# Allegro board EZFET_V10A.brd
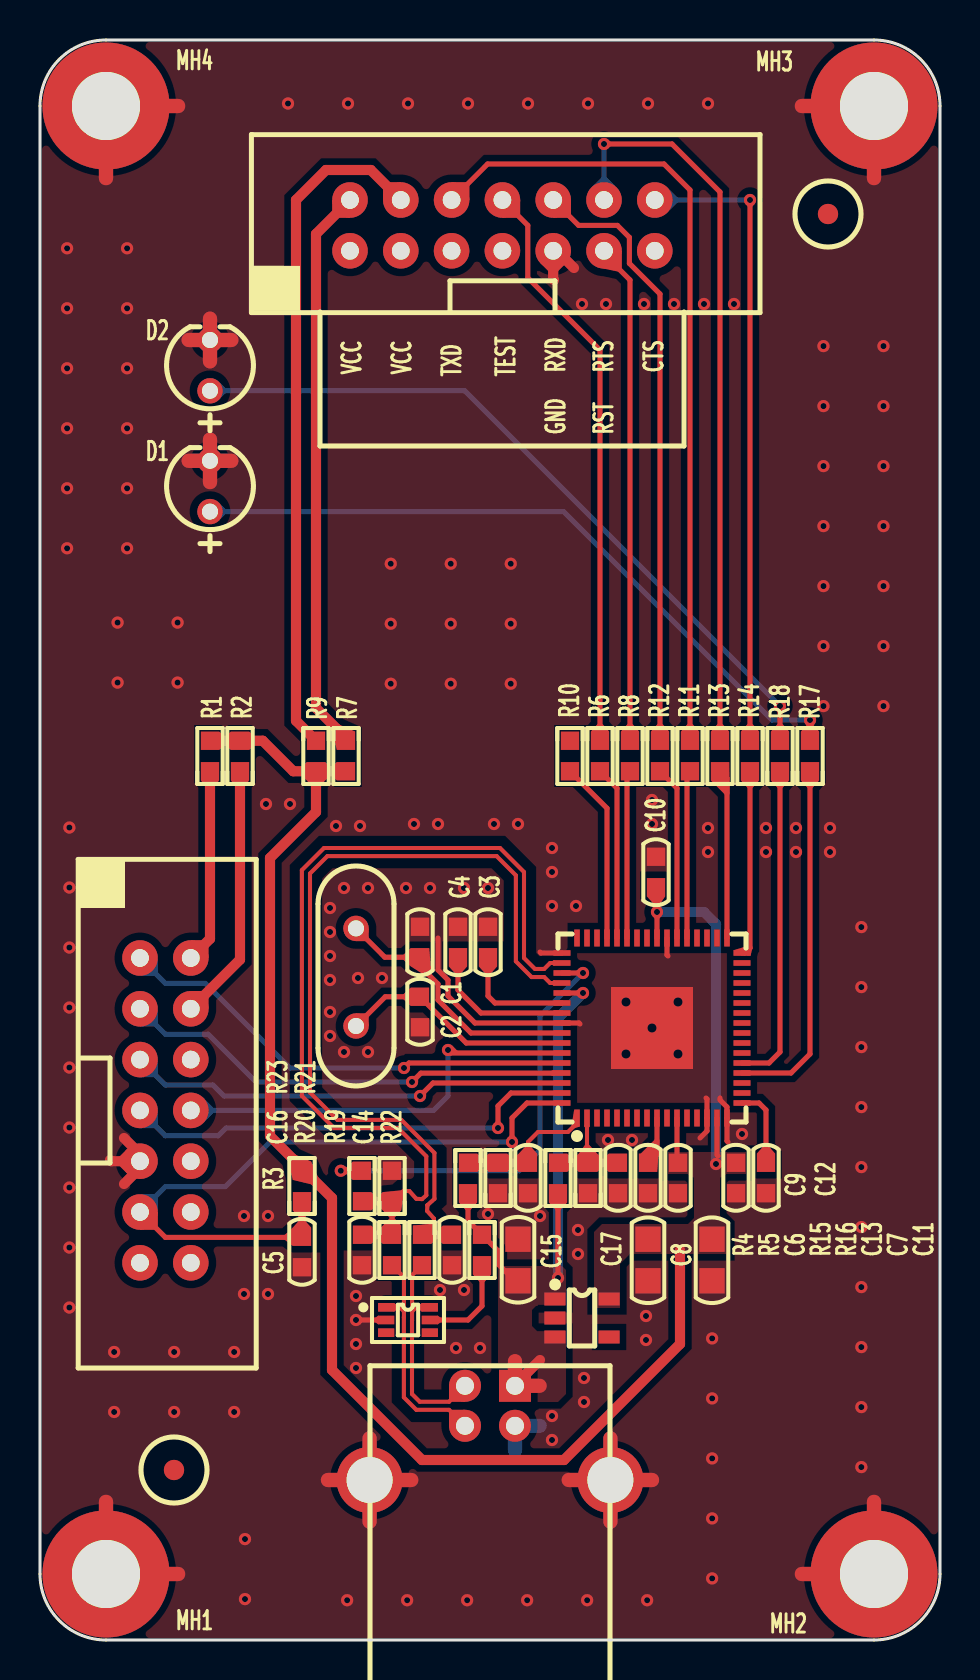
[diagram p0: board, top side]
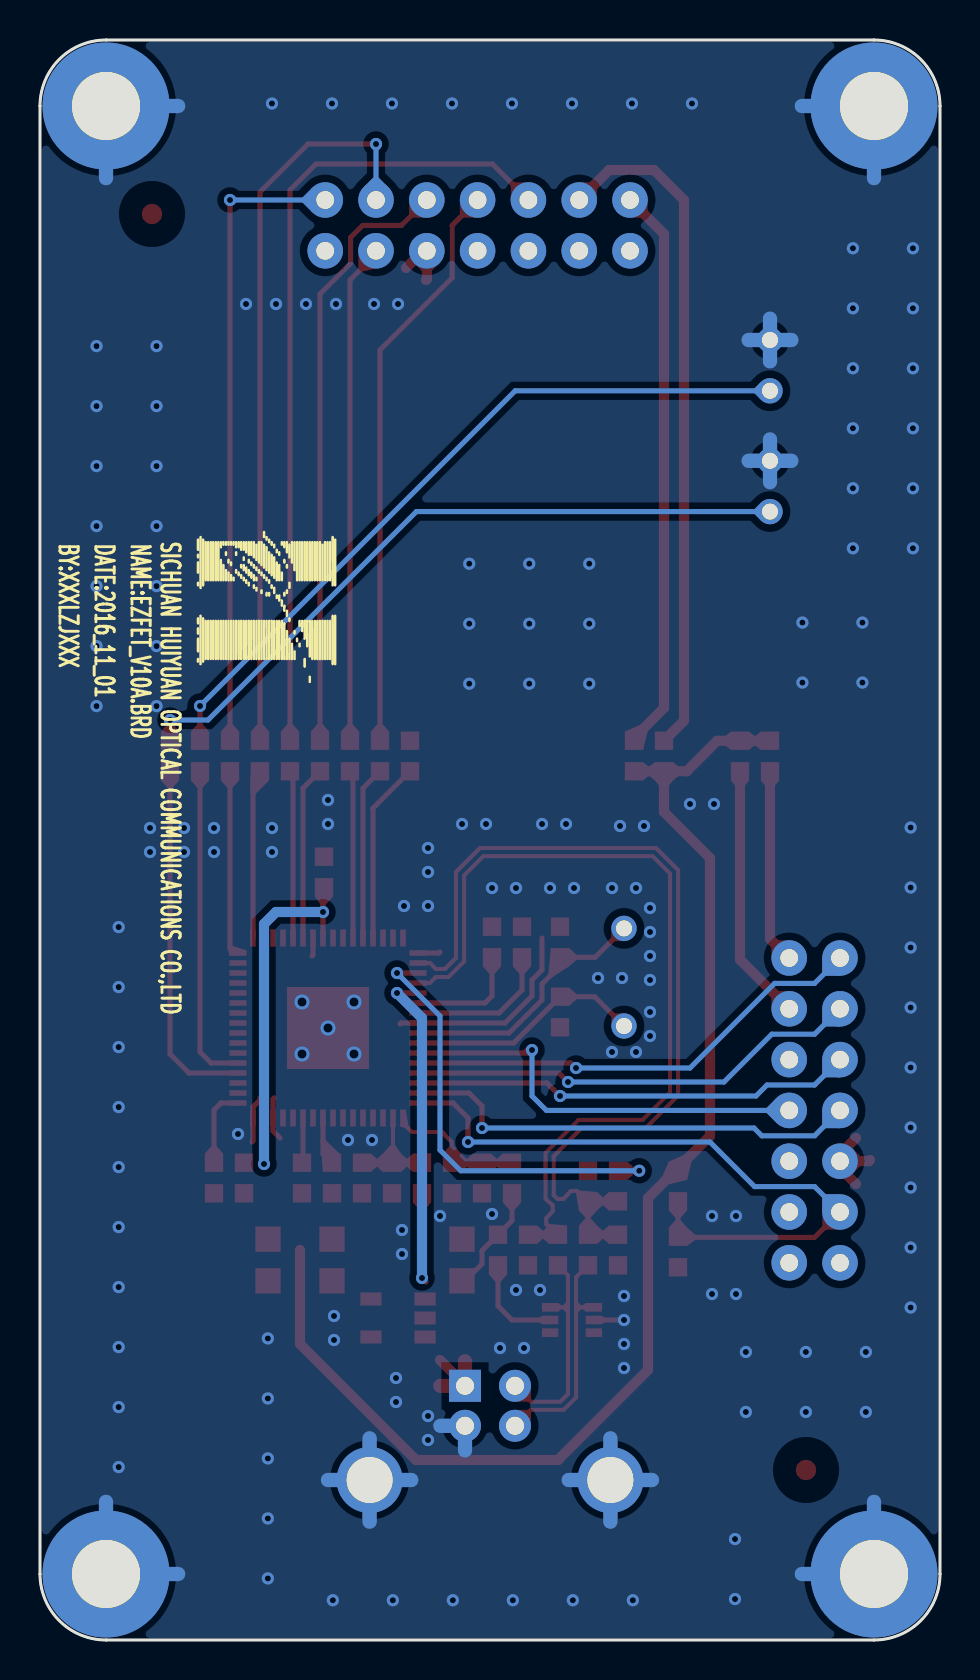
[diagram p1: board, bottom side, seen from below]

Outline 45 x 80 mm; copper layers: TOP, BOTTOM. Coordinates in mm from the lower left corner of the outline.
Outline path: 0,76.7 0,3.3 arc(0.97,0.97) 3.3,0 41.7,0 arc(44.03,0.97) 45,3.3 45,76.7 arc(44.03,79.03) 41.7,80 3.3,80 arc(0.97,79.03) 0,76.7

## Design rules (mm)
net group DP1: nets EZFET_DM EZFET_DP
net group DP2: nets EZFET_PU.0/DP EZFET_PU.1/DM

## Placement (name value [footprint] x y rotation side)
C1  20pF_50V  [CC0603]  19 34.9 270 top
C2  20pF_50V  [CC0603]  19 31.4 90 top
C3  220nF_50V  [CC0603]  22.4 34.9 270 top
C4  220nF_50V  [CC0603]  20.9 34.9 270 top
C5  1nF_50V  [CC0603]  13.1 19.4 90 top
C6  33pF_50V  [CC0603]  24.4 23.1 90 top
C7  0.1uF_50V  [CC0603]  30.4 23.1 90 top
C8  10uF_25V  [CC0805]  33.6 19 270 top
C9  0.1uF_50V  [CC0603]  34.8 23.1 90 top
C10  0.1uF_50V  [CC0603]  30.8 38.4 270 top
C11  0.1uF_50V  [CC0603]  31.9 23.1 90 top
C12  470nF_50V  [CC0603]  36.3 23.1 90 top
C13  33pF_50V  [CC0603]  28.9 23.1 90 top
C14  10pF_50V  [CC0603]  20.6 19.5 90 top
C15  10uF_25V  [CC0805]  23.9 19 90 top
C16  10pF_50V  [CC0603]  16.1 19.5 90 top
C17  10uF_25V  [CC0805]  30.4 19 270 top
D1  LED_RED  [LED_3R00]  8.5 56.42 90 top
D2  LED_GREEN  [LED_3R00]  8.5 62.46 90 top
JP1  -  [JTAG]  5 34.1 270 top
JP2  -  [JTAG]  15.5 69.46 0 top
MH1  Hold  [HOLD250D134]  3.3 3.3 0 top
MH2  Hold  [HOLD250D134]  41.7 3.3 0 top
MH3  Hold  [HOLD250D134]  41.7 76.7 0 top
MH4  Hold  [HOLD250D134]  3.3 76.7 0 top
MP1  MarkPoint  [MARKPOINT_R3]  6.7 8.5 0 top
MP2  MarkPoint  [MARKPOINT_R3]  39.4 71.3 0 top
NOREF  -  []  0 7.3 0 top
NOREF#2  -  []  7.1 0 90 top
R1  0R/NI  [RC0603]  8.5 44.2 270 top
R2  0R  [RC0603]  10 44.2 270 top
R3  47K  [RC0603]  13.1 22.7 270 top
R4  240K  [RC0603]  21.4 23.1 90 top
R5  150K  [RC0603]  22.9 23.1 270 top
R6  10R  [RC0603]  28 44.2 90 top
R7  0R/NI  [RC0603]  15.3 44.2 90 top
R8  10R  [RC0603]  29.5 44.2 90 top
R9  0R  [RC0603]  13.8 44.2 90 top
R10  10R  [RC0603]  26.5 44.2 90 top
R11  10R  [RC0603]  32.5 44.2 90 top
R12  10R  [RC0603]  31 44.2 90 top
R13  10R  [RC0603]  34 44.2 90 top
R14  10R  [RC0603]  35.5 44.2 90 top
R15  220K  [RC0603]  25.9 23.1 90 top
R16  220K  [RC0603]  27.4 23.1 270 top
R17  510R  [RC0603]  38.5 44.2 270 top
R18  510R  [RC0603]  37 44.2 270 top
R19  27R  [RC0603]  19.1 19.5 90 top
R20  27R  [RC0603]  17.6 19.5 90 top
R21  1M  [RC0603]  17.6 22.7 270 top
R22  10K  [RC0603]  22.1 19.5 90 top
R23  1.4K  [RC0603]  16.1 22.7 90 top
U1  MSP430F5528IRGC  [VQFN-64]  30.6 30.6 0 top
U2  SPX3819M5-L-3-3/TR  [SOT23-5]  27.1 16.1 270 top
U3  NUP4202W1T2G  [SC-88]  18.4 16 0 top
USB1  -  [USB-B]  22.5 12.71 0 top
X1  XTAL_4MHz_X49SD4MSD2SC  [X-HC-49S]  15.8 30.7 90 top

## Library data of the parts
C1-C7 C9-C14 C16 = CAP NP
C8 = C_Generic
C15 C17 = CAP NP_2
D1 D2 = LED_4
JP1 JP2 = JTAG
MH1-MH4 = Hold_1
MP1 MP2 = MarkPoint
R1-R23 = R_Generic
U1 = MSP430F5528IRGC
U2 = SPX3819M5-L-1-2
U3 = nup2202w1_D_2
USB1 = USB-B
X1 = XTAL_5032_0

## Footprints (pads in the part's own frame, mm; a bottom-side part is the same pattern mirrored in y, then rotated)
CC0603
  rect 0.914x0.914 smd: 1(-0.762,0) 2(0.762,0)
CC0805
  rect 1.27x1.27 smd: 1(-1.041,0) 2(1.041,0)
HOLD250D134
  round 6.35 hole 3.404: 1(0,0)
JTAG
  round 1.778 hole 0.889: 1(0,0) 2(0,2.54) 3(2.54,0) 4(2.54,2.54) 5(5.08,0) 6(5.08,2.54) 7(7.62,0) 8(7.62,2.54) 9(10.16,0) 10(10.16,2.54) 11(12.7,0) 12(12.7,2.54) 13(15.24,0) 14(15.24,2.54)
LED_3R00
  round 1.27 hole 0.8: 1(0,0) 2(2.54,0)
MARKPOINT_R3
  round 1.016 smd: 1(0,0)
RC0603
  rect 0.914x0.914 smd: 1(-0.762,0) 2(0.762,0)
SC-88
  rect 0.813x0.432 smd: 1(-1.092,0.635) 2(-1.092,0) 3(-1.092,-0.635) 4(1.092,-0.635) 5(1.092,0) 6(1.092,0.635)
SOT23-5
  rect 0.65x1.06 smd: 1(-0.95,-1.354) 2(0,-1.354) 3(0.95,-1.354) 4(0.95,1.354) 5(-0.95,1.354)
USB-B
  rect 1.6x1.6 hole 0.9: 1(1.25,0)
  round 1.6 hole 0.9: 2(-1.25,0) 3(-1.25,-2) 4(1.25,-2)
  round 3.3 hole 2.3: 5(6.02,-4.71) 6(-6.02,-4.71)
VQFN-64
  rect 0.28x0.85 smd: 1(-3.75,-4.5) 2(-3.25,-4.5) 3(-2.75,-4.5) 4(-2.25,-4.5) 5(-1.75,-4.5) 6(-1.25,-4.5) 7(-0.75,-4.5) 8(-0.25,-4.5) 9(0.25,-4.5) 10(0.75,-4.5) 11(1.25,-4.5) 12(1.75,-4.5) 13(2.25,-4.5) 14(2.75,-4.5) 15(3.25,-4.5) 16(3.75,-4.5) 33(3.75,4.5) 34(3.25,4.5) 35(2.75,4.5) 36(2.25,4.5) 37(1.75,4.5) 38(1.25,4.5) 39(0.75,4.5) 40(0.25,4.5) 41(-0.25,4.5) 42(-0.75,4.5) 43(-1.25,4.5) 44(-1.75,4.5) 45(-2.25,4.5) 46(-2.75,4.5) 47(-3.25,4.5) 48(-3.75,4.5)
  rect 0.85x0.28 smd: 17(4.5,-3.75) 18(4.5,-3.25) 19(4.5,-2.75) 20(4.5,-2.25) 21(4.5,-1.75) 22(4.5,-1.25) 23(4.5,-0.75) 24(4.5,-0.25) 25(4.5,0.25) 26(4.5,0.75) 27(4.5,1.25) 28(4.5,1.75) 29(4.5,2.25) 30(4.5,2.75) 31(4.5,3.25) 32(4.5,3.75) 49(-4.5,3.75) 50(-4.5,3.25) 51(-4.5,2.75) 52(-4.5,2.25) 53(-4.5,1.75) 54(-4.5,1.25) 55(-4.5,0.75) 56(-4.5,0.25) 57(-4.5,-0.25) 58(-4.5,-0.75) 59(-4.5,-1.25) 60(-4.5,-1.75) 61(-4.5,-2.25) 62(-4.5,-2.75) 63(-4.5,-3.25) 64(-4.5,-3.75)
  rect 4.1x4.1 smd: 65(0,0)
X-HC-49S
  round 1.27 hole 0.8: 1(0,0) 2(4.88,0)

## Nets
GND: C1.1 C2.1 C3.1 C4.1 C5.1 C6.1 C7.1 C8.2 C9.1 C10.1 C11.1 C12.1 C13.1 C14.1 C15.2 C16.1 C17.2 D1.2(CATHODE) D2.2(CATHODE) JP1.9 JP2.9 MH1.1 MH2.1 MH3.1 MH4.1 R5.2 R16.2 R21.1 U1.14(AVSS1) U1.16(DVSS1) U1.39(DVSS2) U1.49(VSSU) U1.56(AVSS2) U1.65(GND) U2.2(GND) U3.2 USB1.4(GND) USB1.5(S1) USB1.6(S2)
EZFET_AVBUS: C6.2 R4.2 R5.1 U1.1(P6.0/CB0/A0)
EZFET_AVCC2ADC: C13.2 R15.2 R16.1 U1.2(P6.1/CB1/A1)
EZFET_DM: R19.1 U3.6 USB1.2(D-)
EZFET_DP: R20.1 U3.1 USB1.3(D+)
EZFET_LED0: R17.2 U1.20(P1.2/TA0.1)
EZFET_LED1: R18.2 U1.21(P1.3/TA0.2)
EZFET_PU.0/DP: C16.2 R20.2 R21.2 R23.1 U1.50(PU.0/DP)
EZFET_PU.1/DM: C14.2 R19.2 U1.52(PU.1/DM)
EZFET_PUR: R23.2 U1.51(PUR)
EZFET_RST: C5.2 JP1.11 R3.2 U1.64(R\S\T\/NMI/SBWTDIO)
EZFET_TCK: JP1.7 U1.63(PJ.3/TCK)
EZFET_TDI: JP1.3 U1.61(PJ.1/TDI/TCLK)
EZFET_TDO: JP1.1 U1.60(PJ.0/TDO)
EZFET_TEST: JP1.8 U1.59(TEST/SBWTCK)
EZFET_TMS: JP1.5 U1.62(PJ.2/TMS)
EZFET_V18: C4.2 U1.55(V18)
EZFET_VBUS: C15.1 R4.1 R15.1 R22.2 U1.53(VBUS) U2.1(VIN) U2.3(EN) USB1.1(VBUS)
EZFET_VCC: C8.1 C9.2 C10.2 C11.2 C17.1 R1.1 R2.1 R3.1 R7.1 R9.1 U1.11(AVCC1) U1.15(DVCC1) U1.40(DVCC2) U2.5(VOUT)
EZFET_VCORE: C12.2 U1.17(VCORE)
EZFET_VREF: C7.2 U1.9(P5.0/A8/VREF+/VEREF+)
EZFET_VUSB: C3.2 U1.54(VUSB)
T_NC_TMSC: R10.2
T_RST_RST: JP2.11 R8.2
T_TEST_TCKC: JP2.8 R6.2
T_UART_CTS: JP2.14 R14.2
T_UART_RTS: JP2.12 R13.2
T_UART_RXD: JP2.10 R12.2
T_UART_TXD: JP2.6 R11.2
N16723135: C2.2 U1.58(P5.3/XT2OUT) X1.1
N16723141: C1.2 U1.57(P5.2/XT2IN) X1.2
N16723191: D1.1(ANODE) R17.1
N16723193: D2.1(ANODE) R18.1
N16723211: R14.1 U1.32(P2.6/RTCCLK/DMAE0)
N16723239: R11.1 U1.37(P3.3/UCA0TXD/UCA0SIMO)
N16723243: R12.1 U1.38(P3.4/UCA0RXD/UCA0SOMI)
N16723247: R13.1 U1.33(P2.7/UCB0STE/UCA0CLK)
N16723303: R22.1 U3.5
N16723383: JP1.4 R2.2
N16723385: JP1.2 R1.2
N16723405: JP2.4 R9.2
N16723407: JP2.2 R7.2
N16729620: R6.1 U1.44(P4.3/PM_UCB1CLK/PM_UCA1STE)
N16729632: R8.1 U1.43(P4.2/PM_UCB1SOMI/PM_UCB1_SCL)
N16729644: R10.1 U1.45(P4.4/PM_UCA1TXD/PM_UCA1SIMO)

Pads without a net: JP1 6 10 12 13 14; JP2 1 3 5 7 13; MP1 1; MP2 1; U1 3 4 5 6 7 8 10 12 13 18 19 22 23 24 25 26 27 28 29 30 31 34 35 36 41 42 46 47 48; U2 4; U3 3 4

## Via types
v1: diameter 0.61, hole 0.305, TOP to BOTTOM, 170 vias
v2: diameter 0.762, hole 0.457, TOP to BOTTOM, 5 vias

## Routing (per net, layer and track width the routed paths; a pad name or vN(x,y) marks a point on that pad's centre or on a via; arc(x,y) is an arc through that point)
GND: length 136.3
  TOP w0.254: U1.39 31.35,34.25 31.4,34.2 ; U1.49 25.05,34.35 25,34.4 ; 33,25.1 33.35,25.45 U1.14 33.35,27.05 33.3,27.1 ; 34.4,24.9 34.35,24.95 U1.16 34.35,26.65 34,27 34,27.1 ; 27,30.8 26.95,30.85 U1.56 21.75,30.85 20.4,32.2 20.4,33 19.9,33.5 19.9,35.1 ; U3.2 v1(15.8,16)
  TOP w0.508: JP1.9 5,23.6 4.2,22.8 ; JP1.9 5,24.3 4.2,25.1 ; JP1.9 3.56,23.94 3.5,24 ; 25.7,68 25.66,68.04 JP2.9 25.84,69.46 26.7,68.6
  TOP w0.711: 3.3,73.09 MH4.1 6.91,76.7 ; D2.2 9.57,65 ; D2.2 8.5,63.93 ; D2.2 8.5,66.07 ; D2.2 7.43,65 ; 38.09,3.3 MH2.1 41.7,6.91 ; 28.52,5.92 USB1.5 ; USB1.5 28.52,10.08 ; USB1.5 30.6,8 ; USB1.5 26.44,8 ; 6.91,3.3 MH1.1 3.3,6.91 ; D1.2 9.57,58.96 ; D1.2 7.43,58.96 ; D1.2 8.5,57.89 ; D1.2 8.5,60.03 ; 16.48,5.92 USB1.6 ; USB1.6 16.48,10.08 ; USB1.6 14.4,8 ; USB1.6 18.56,8 ; 41.7,73.09 MH3.1 38.09,76.7
  BOTTOM w0.711: 23.75,9.48 USB1.4 24.98,10.71 ; 41.7,73.09 MH3.1 38.09,76.7 ; 6.91,76.7 MH4.1 3.3,73.09 ; D2.2 8.5,66.07 ; D2.2 7.43,65 ; D2.2 9.57,65 ; D2.2 8.5,63.93 ; USB1.6 18.56,8 ; USB1.6 14.4,8 ; USB1.6 16.48,10.08 ; USB1.6 16.48,5.92 ; 26.44,8 USB1.5 ; USB1.5 28.52,10.08 ; USB1.5 30.6,8 ; USB1.5 28.52,5.92 ; 6.91,3.3 MH1.1 3.3,6.91 ; D1.2 8.5,60.03 ; D1.2 7.43,58.96 ; D1.2 8.5,57.89 ; D1.2 9.57,58.96 ; 38.09,3.3 MH2.1 41.7,6.91
  vias: v1(1.35,69.59) v1(1.35,66.59) v1(1.35,63.59) v1(1.35,60.59) v1(1.35,57.59) v1(1.35,54.59) v1(1.47,40.62) v1(1.47,37.62) v1(1.47,34.62) v1(1.47,31.62) v1(1.47,28.62) v1(1.47,25.62) v1(1.47,22.62) v1(1.47,19.62) v1(1.47,16.62) v1(3.71,14.4) v1(3.71,11.4) v1(3.88,50.87) v1(3.88,47.87) v1(4.35,69.59) v1(4.35,66.59) v1(4.35,63.59) v1(4.35,60.59) v1(4.35,57.59) v1(4.35,54.59) v1(6.71,14.4) v1(6.71,11.4) v1(6.88,50.87) v1(6.88,47.87) v1(9.71,14.4) v1(9.71,11.4) v1(10.2,21.2) v1(10.2,17.3) v1(10.25,5.05) v1(10.25,2.05) v1(11.3,41.8) v1(11.4,21.2) v1(11.4,17.3) v1(12.4,76.82) v1(12.5,41.8) v1(14.5,36.6) v1(14.5,35.4) v1(14.5,34.2) v1(14.5,33) v1(14.5,31.4) v1(14.5,30.2) v1(14.8,40.7) v1(15.2,37.6) v1(15.2,29.4) v1(15.4,76.82) v1(15.36,1.99) v1(15.8,17.2) v1(15.8,14.8) v1(15.8,13.6) v1(15.9,33.1) v1(16,40.7) v1(16.4,37.6) v1(16.4,29.4) v1(17.1,33.1) v1(17.54,53.81) v1(17.54,50.81) v1(17.54,47.81) v1(18.3,37.6) v1(18.4,76.82) v1(18.36,1.99) v1(18.7,40.8) v1(19.5,37.6) v1(19.9,40.8) v1(20,17.5) v1(20.54,53.81) v1(20.54,50.81) v1(20.54,47.81) v1(20.8,14.6) v1(21.2,37.6) v1(21.2,17.5) v1(21.4,76.82) v1(21.36,1.99) v1(22,14.6) v1(22.4,37.6) v1(22.4,21.3) v1(22.7,40.8) v1(23.54,53.81) v1(23.54,50.81) v1(23.54,47.81) v1(23.9,40.8) v1(24.4,76.82) v1(24.36,1.99) v1(25,21.2) v1(25.6,39.6) v1(25.6,38.4) v1(25.6,36.7) v1(25.6,11.2) v1(25.6,10) v1(26.8,36.7) v1(26.9,20.5) v1(26.9,19.3) v1(27.1,66.8) v1(27.2,13.1) v1(27.2,11.9) v1(27.4,76.82) v1(27.36,1.99) v1(28.3,66.8) v1(28.4,25) v1(29.6,25) v1(30.2,66.8) v1(30.3,16.2) v1(30.3,15) v1(30.4,76.82) v1(30.36,1.99) v1(30.6,42) v1(30.6,40.8) v1(31.7,66.8) v1(33.2,66.8) v1(33.4,76.82) v1(33.4,40.6) v1(33.4,39.4) v1(33.61,15.08) v1(33.61,12.08) v1(33.61,9.08) v1(33.61,6.08) v1(33.61,3.08) v1(34.7,66.8) v1(35.1,25.3) v1(36.3,40.6) v1(36.3,39.4) v1(37.8,40.6) v1(37.8,39.4) v1(39.17,64.7) v1(39.17,61.7) v1(39.17,58.7) v1(39.17,55.7) v1(39.17,52.7) v1(39.17,49.7) v1(39.17,46.7) v1(39.5,40.6) v1(39.5,39.4) v1(41.07,35.65) v1(41.07,32.65) v1(41.07,29.65) v1(41.07,26.65) v1(41.07,23.65) v1(41.07,20.65) v1(41.07,17.65) v1(41.07,14.65) v1(41.07,11.65) v1(41.07,8.65) v1(42.17,64.7) v1(42.17,61.7) v1(42.17,58.7) v1(42.17,55.7) v1(42.17,52.7) v1(42.17,49.7) v1(42.17,46.7) v2(29.3,31.9) v2(29.3,29.3) v2(30.6,30.6) v2(31.9,31.9) v2(31.9,29.3)
EZFET_AVBUS: length 7.1
  TOP w0.203: U1.1 26.85,25.85 26.4,25.4 24.9,25.4 24.4,24.9 C6.2 R5.1 R4.2
EZFET_AVCC2ADC: length 5.3
  TOP w0.203: R16.1 27.35,23.91 U1.2 ; R16.1 R15.2 ; R16.1 C13.2
EZFET_DM: length 10.6
  TOP w0.203: USB1.2 20.45,11.91 18.99,11.91 18.6,12.3 18.6,15.97 18.6,15.98 18.6,16.43 18.81,16.64 ; 18.81,16.64 18.6,16.84 18.6,18.24 R19.1 ; 18.81,16.64 U3.6
EZFET_DP: length 11.4
  TOP w0.203: R20.1 18.2,18.14 18.2,16.84 17.99,16.64 ; USB1.3 20.45,11.51 18.82,11.51 18.19,12.13 18.19,16.14 18.2,16.14 18.2,16.43 17.99,16.64 ; 17.99,16.64 U3.1
EZFET_LED0: length 17.9
  TOP w0.254: R17.2 38.5,29.3 37.55,28.35 U1.20
EZFET_LED1: length 16.2
  TOP w0.254: U1.21 36.45,28.85 37,29.4 R18.2
EZFET_PU.0/DP: length 46.2
  TOP w0.203: U1.50 25.51,33.85 25.21,33.55 24.75,33.55 24.2,34.1 24.2,38.4 23,39.6 14.2,39.6 13.09,38.49 13.09,27.21 14.7,25.6 17.9,25.6 19.31,24.19 19.31,22.24 19.1,22.04 18.81,22.06 18.47,22.44 18.18,22.46 R21.2 ; R23.1 R21.2 ; R21.2 R20.2 C16.2
EZFET_PU.1/DM: length 42.7
  TOP w0.203: C14.2 R19.2 19.68,20.78 19.7,21.07 19.36,21.45 19.37,21.74 19.72,22.05 19.72,24.35 18.07,26.01 14.87,26.01 13.5,27.37 13.5,38.33 14.37,39.19 22.83,39.19 23.79,38.23 23.79,33.93 24.58,33.15 25.21,33.15 25.51,32.85 U1.52
EZFET_PUR: length 22.2
  TOP w0.254: R23.2 v1(15.04,23.46) ; U1.51 v1(27.15,33.35)
  BOTTOM w0.254: v1(27.15,33.35) 25,31.2 25,24.5 23.96,23.46 v1(15.04,23.46)
EZFET_RST: length 34.5
  TOP w0.254: R3.2 C5.2 13.07,20.13 6.27,20.13 JP1.11 ; v1(23.6,24.9) 23.6,26.1 24.35,26.85 U1.64
  BOTTOM w0.254: JP1.11 6.27,22.67 9.27,22.67 11.5,24.9 v1(23.6,24.9)
EZFET_TCK: length 23.2
  TOP w0.254: v1(22.9,25.6) 22.9,26.7 23.55,27.35 U1.63
  BOTTOM w0.254: JP1.7 6.27,25.21 8.91,25.21 9.3,25.6 v1(22.9,25.6)
EZFET_TDI: length 22.8
  TOP w0.254: U1.61 25.64,28.35 25.64,28.34 19.04,28.34 v1(18.6,27.9)
  BOTTOM w0.254: JP1.3 6.27,30.29 8.41,30.29 10.8,27.9 v1(18.6,27.9)
EZFET_TDO: length 23.5
  TOP w0.254: U1.60 18.45,28.85 v1(18.2,28.6)
  BOTTOM w0.254: JP1.1 6.27,32.83 8.27,32.83 12.5,28.6 v1(18.2,28.6)
EZFET_TEST: length 21.2
  TOP w0.254: v1(20.4,29.5) 20.55,29.35 U1.59
  BOTTOM w0.254: JP1.8 19.68,26.48 20.4,27.2 v1(20.4,29.5)
EZFET_TMS: length 22.1
  TOP w0.254: v1(19,27.2) 19.65,27.85 U1.62
  BOTTOM w0.254: JP1.5 6.27,27.75 8.65,27.75 9.2,27.2 v1(19,27.2)
EZFET_V18: length 7.3
  TOP w0.254: U1.55 22.05,31.35 20.9,32.5 C4.2
EZFET_VBUS: length 30.1
  TOP w0.254: C15.1 23.74,17.96 22.9,18.8 22.9,19.46 R22.2 21.4,20.96 R4.1 ; U1.53 v1(27.15,32.35) ; 25.7,17.9 v1(25.9,18.1) R15.1
  TOP w0.508: 23.75,12.75 25,14
  TOP w0.711: 23.75,13.94 USB1.1 24.98,12.71
  BOTTOM w0.508: v1(25.9,18.1) 25.9,31.1 v1(27.15,32.35)
EZFET_VCC: length 88
  TOP w0.254: 33.9,24.2 33.85,24.25 U1.15 ; U1.11 31.85,23.91 C11.2 ; C10.2 30.85,37.59 v1(30.85,36.4) U1.40
  TOP w0.508: R9.1 12.66,43.44 11.14,44.96 R2.1 R1.1 ; R9.1 R7.1 ; R9.1 13.8,41.4 11.5,39.1 11.5,25.2 13.1,23.6 R3.1 13.24,23.46 14.6,22.1 14.6,13.5 19.1,9 26.2,9 32,14.8 32,19.5
  BOTTOM w0.508: v1(33.8,23.8) 33.8,35.8 33.2,36.4 v1(30.85,36.4)
EZFET_VCORE: length 4
  TOP w0.254: U1.17 35.95,26.85 36.3,26.5 C12.2
EZFET_VREF: length 2.4
  TOP w0.254: U1.9 30.85,24.31 C7.2
EZFET_VUSB: length 5.8
  TOP w0.254: U1.54 22.75,31.85 22.4,32.2 C3.2
T_RST_RST: length 25
  TOP w0.254: JP2.11 28.2,69.3 29.5,68 R8.2
T_TEST_TCKC: length 29.1
  TOP w0.254: JP2.8 24.39,70.73 24.39,68.11 28,64.5 R6.2
T_UART_CTS: length 31.8
  TOP w0.254: R14.2 v1(35.5,72)
  BOTTOM w0.254: v1(35.5,72) JP2.14
T_UART_RTS: length 37
  TOP w0.254: R13.2 34,72.4 31.6,74.8 v1(28.2,74.8)
  BOTTOM w0.254: v1(28.2,74.8) JP2.12
T_UART_RXD: length 30.4
  TOP w0.254: R12.2 31,67.3 29.47,68.83 29.47,70.13 28.87,70.73 26.93,70.73 JP2.10
T_UART_TXD: length 40.7
  TOP w0.254: JP2.6 22.38,73.8 31.2,73.8 32.5,72.5 R11.2
N16723135: length 11.9
  TOP w0.254: U1.58 21.31,29.85 C2.2 17.26,32.16 X1.1
N16723141: length 13.2
  TOP w0.254: X1.2 17.24,34.14 C1.2 19,33.7 19.9,32.8 19.9,32 21.55,30.35 U1.57
N16723191: length 35.4
  TOP w0.254: v1(38.5,46) R17.1
  BOTTOM w0.254: v1(38.5,46) 36.6,46 26.18,56.42 D1.1
N16723193: length 36.8
  TOP w0.254: R18.1 v1(37,46.7)
  BOTTOM w0.254: D2.1 21.24,62.46 v1(37,46.7)
N16723211: length 9.3
  TOP w0.254: U1.32 35.25,34.35 35.5,34.6 R14.1
N16723239: length 8.4
  TOP w0.254: U1.37 32.35,43.29 R11.1
N16723243: length 8.7
  TOP w0.254: U1.38 31.85,42.59 R12.1
N16723247: length 8.5
  TOP w0.254: U1.33 34.35,43.09 R13.1
N16723303: length 4.9
  TOP w0.254: U3.5 21.4,16 22.1,16.7 R22.1
N16723383: length 12.9
  TOP w0.508: R2.2 10,34.02 JP1.4
N16723385: length 9.7
  TOP w0.508: R1.2 8.5,35.06 JP1.2
N16723405: length 33.9
  TOP w0.508: JP2.4 16.54,73.5 14.3,73.5 12.8,72 12.8,45.96 R9.2
N16723407: length 28.4
  TOP w0.508: JP2.2 13.8,70.3 13.8,46.6 15.3,45.1 R7.2
N16729620: length 8.7
  TOP w0.254: U1.44 28.85,42.59 R6.1
N16729632: length 8.4
  TOP w0.254: R8.1 29.35,43.29 U1.43
N16729644: length 9.1
  TOP w0.254: U1.45 28.35,41.59 R10.1

## Copper pours and planes (outline as drawn; the poured copper is in the pictures)
GND on TOP: 0.1,76.7 1.04,78.96 3.3,79.9 41.7,79.9 43.95,78.95 44.9,76.7 44.9,3.3 43.96,1.04 41.7,0.1 3.3,0.1 1.04,1.04 0.1,3.3 ; 22 cut-outs
GND on BOTTOM: 0.1,76.7 1.04,78.96 3.3,79.9 41.7,79.9 43.95,78.95 44.9,76.7 44.9,3.3 43.96,1.04 41.7,0.1 3.3,0.1 1.04,1.04 0.1,3.3 ; 11 cut-outs
EZFET_VBUS on TOP: 22.9,11.9 25.9,11.9 26.3,12.3 26.3,15.5 24.8,15.5 24.6,15.7 24.6,16.5 24.8,16.7 26.3,16.7 26.3,18.5 26.1,18.7 22.9,18.7
EZFET_VCC on TOP: 27.7,16.6 27.7,20.4 28.1,20.8 32.4,20.8 32.7,21.1 32.7,23 32.4,23.3 31.4,23.3 31.4,24.4 35.3,24.4 35.3,23.3 34.3,23.3 34,23 34,21.2 34.4,20.8 34.4,19.3 29.5,19.3 29,18.8 29,16.6
GND on TOP (solid shape): 5.06,23.94 4.37,23.31 3.92,23.76 3.85,23.94 3.92,24.12 4.37,24.57
GND on TOP (solid shape): 26.29,68.83 25.84,68.38 25.66,68.31 25.48,68.38 25.03,68.83 25.66,69.52
EZFET_PU.0/DP on TOP (solid shape): 18.1,22.49 18.18,22.46 18.2,22.38 18.06,21.48 17.58,21.92 17.14,22.4
EZFET_PU.1/DM on TOP (solid shape): 19.6,20.81 19.68,20.78 19.7,20.71 19.56,19.8 19.08,20.25 18.64,20.72
EZFET_TEST on BOTTOM (solid shape): 8.71,26.57 8.74,26.48 8.71,26.39 8.17,25.85 7.51,26.48 8.17,27.11
EZFET_VCC on TOP (solid shape): 12.39,24.06 12.48,24.25 12.68,24.31 13.56,23.92 13.14,23.41 12.64,23
EZFET_VCC on TOP (solid shape): 13.95,23.04 13.89,22.84 13.7,22.75 12.64,23 13.05,23.5 13.56,23.92
EZFET_VREF on TOP (solid shape): 30.77,25.05 30.9,25.07 30.98,24.95 30.86,23.4 30.39,23.83 29.96,24.25
T_UART_CTS on BOTTOM (solid shape): 31.91,72.09 31.94,72 31.91,71.91 31.37,71.37 30.71,72 31.37,72.63
T_UART_RTS on BOTTOM (solid shape): 28.11,73.17 28.2,73.2 28.29,73.17 28.83,72.63 28.2,71.97 27.57,72.63
N16723141 on TOP (solid shape): 19.58,33.24 19.52,33.14 19.4,33.13 18.54,33.68 18.99,34.17 19.46,34.6
N16723247 on TOP (solid shape): 34.48,42.34 34.4,42.23 34.27,42.25 33.54,42.98 33.99,43.47 34.46,43.9
N16723407 on TOP (solid shape): 14.59,45.56 14.68,45.75 14.88,45.81 15.76,45.42 15.34,44.91 14.84,44.5

Small or netless copper shapes (teardrops, artwork), in the pictures only: 91 on TOP, 19 on BOTTOM

## Text on the board
Ref Des/Silkscreen Bottom: SICHUAN HUIYUAN OPTICAL COMMUNICATIONS CO.,LTD | NAME:EZFET_V10A.BRD | DATE:2016_11_01 | BY:XXXLZJXXX
Ref Des/Silkscreen Top: VCC | TXD | TEST | RXD | GND | RTS | RST | CTS
DIMENSION: FIGURE | SIZE | 0.3048 | 0.4572 | 0.8 | 0.889 | 0.9 | 2.3 | 3.4036 | DRILL CHART: TOP to BOTTOM | ALL UNITS ARE IN MILLIMETERS | PLATED | QTY | 170 | 5 | 6 | 28 | 4 | 2
